# Altium PCB CC1200_PCB.PcbDoc (part 1 of 2)
Units mm, origin at the board's own origin, x right, y up, seen from the top; angles counter-clockwise.
Board outline 98.5 x 50 mm, 4 copper layers (Top Layer, GND, PWR, Bottom Layer), stack 1.57 mm thick; 129 components, 82 nets, 475 pads, 283 vias.
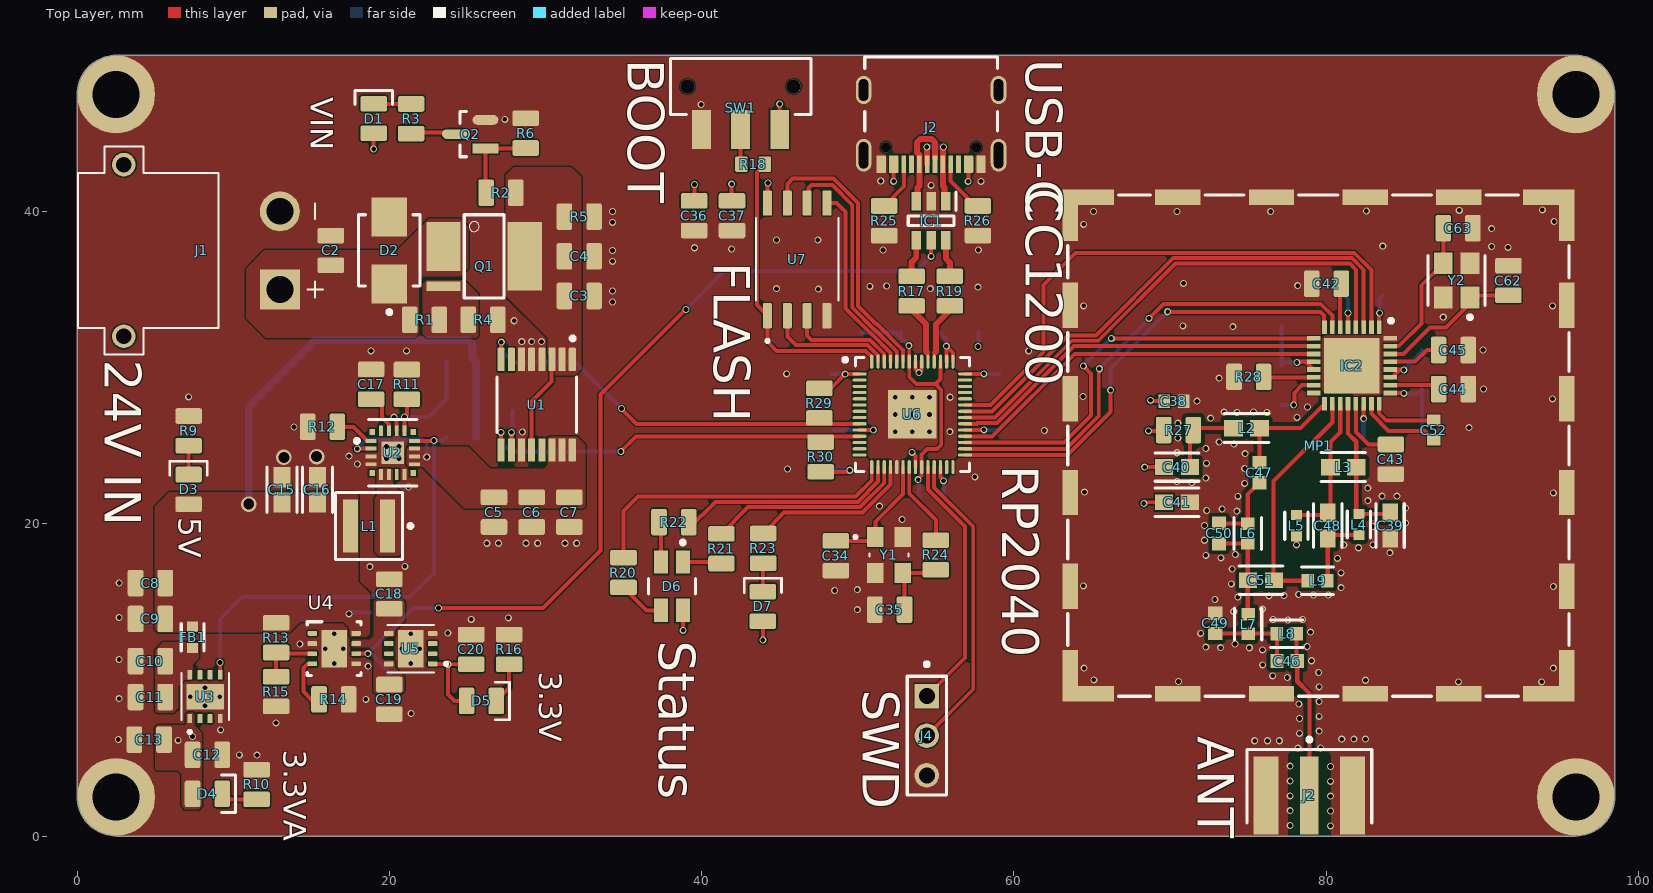
[diagram p0: Top Layer view]
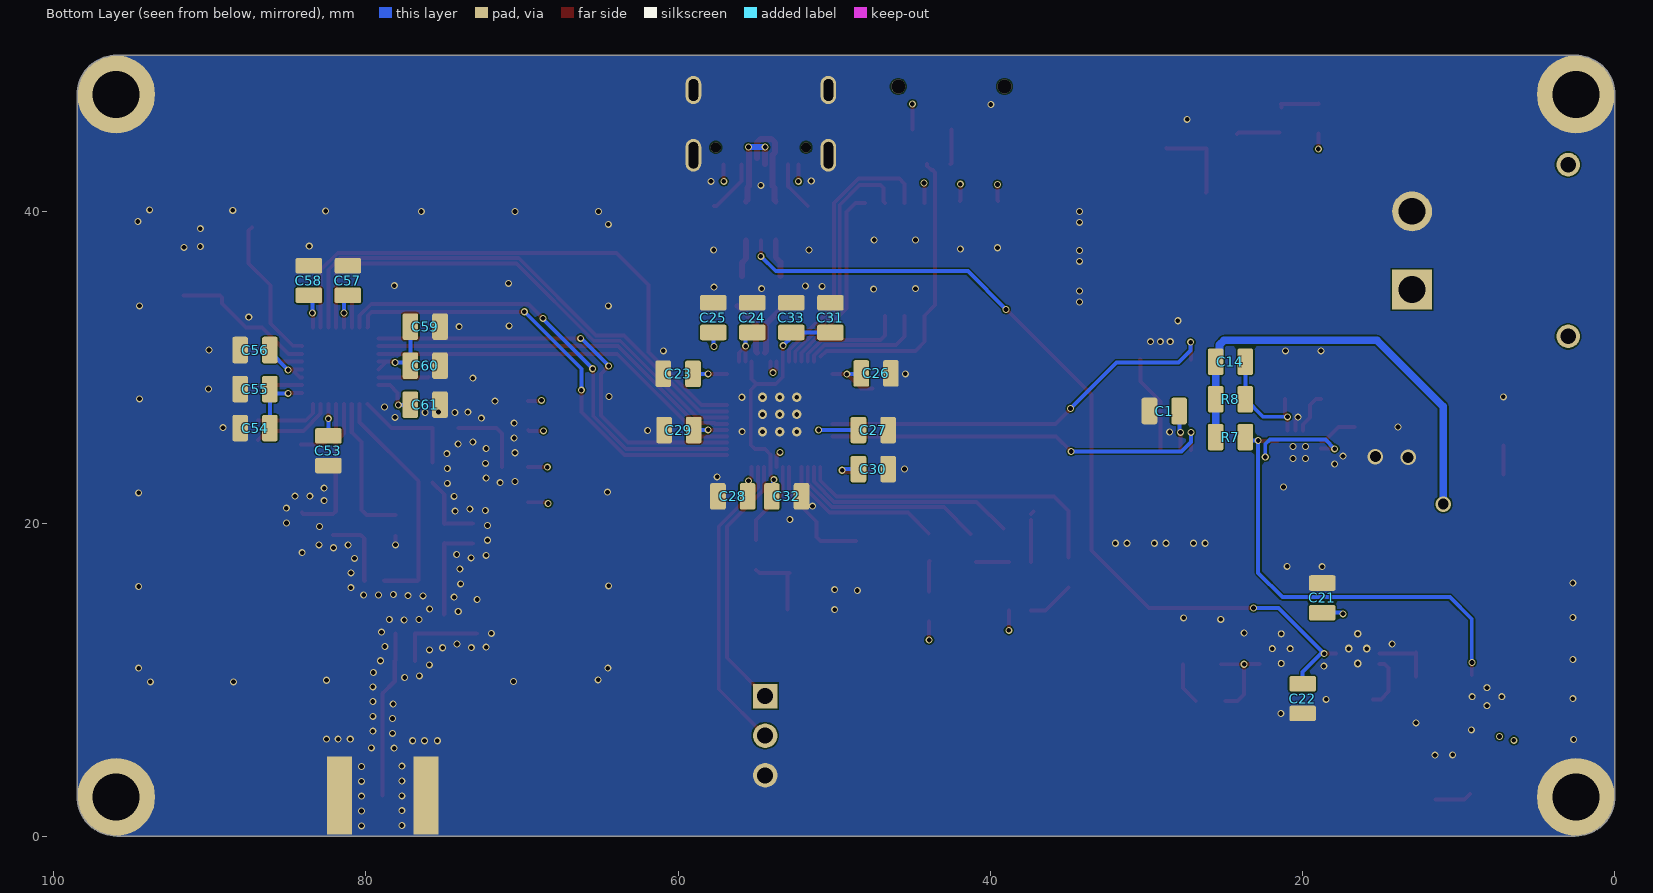
[diagram p1: Bottom Layer view, seen from below]
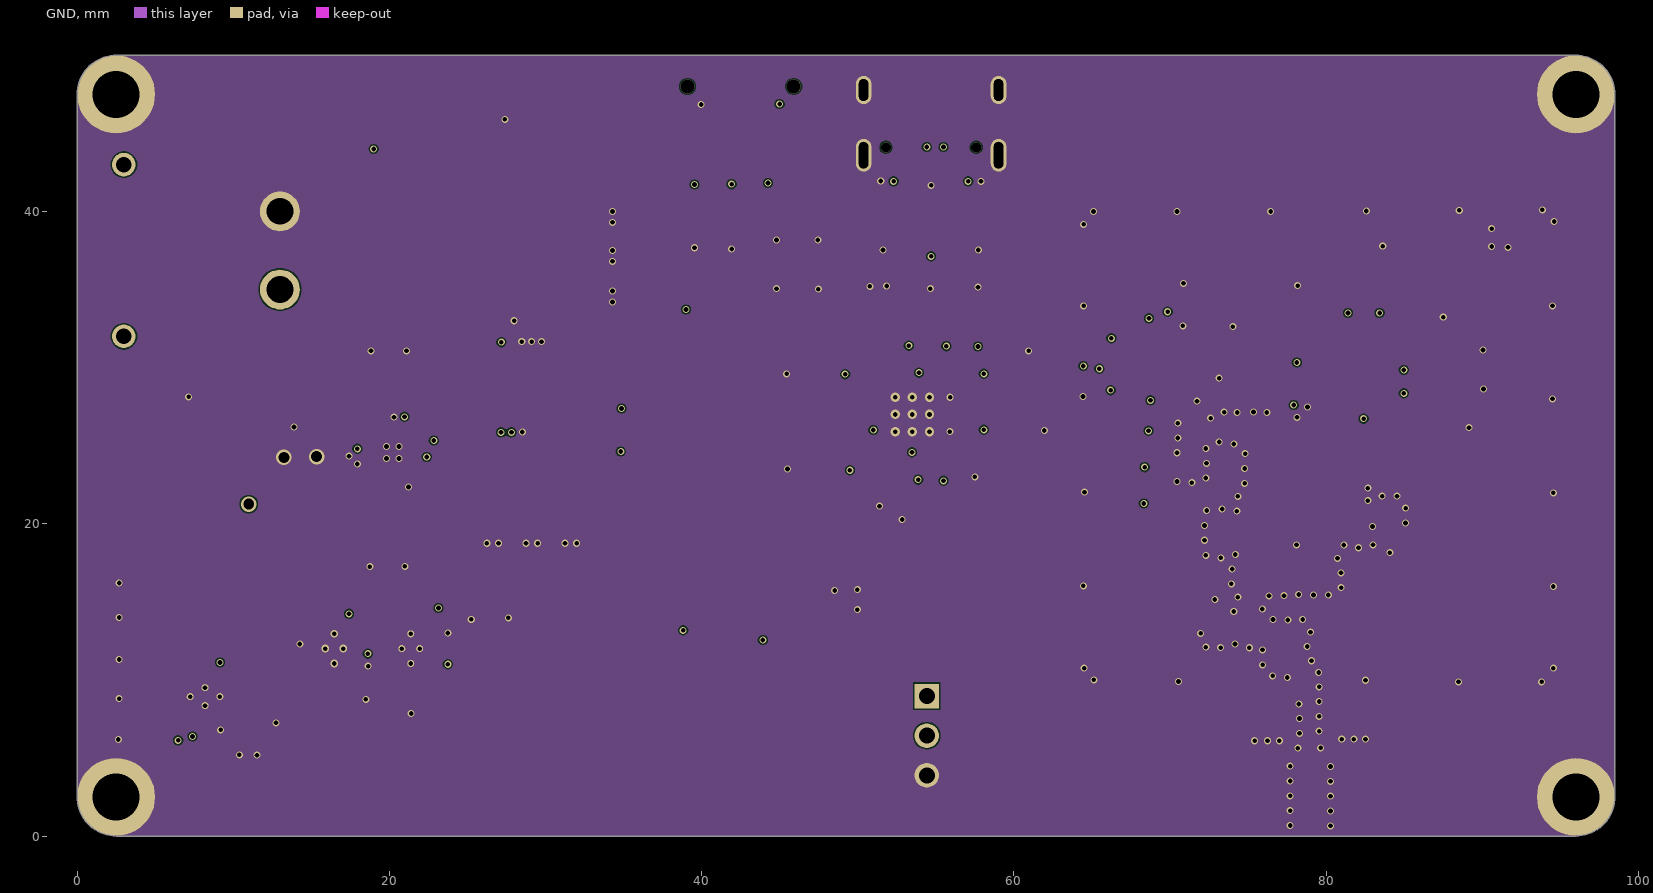
[diagram p2: GND]
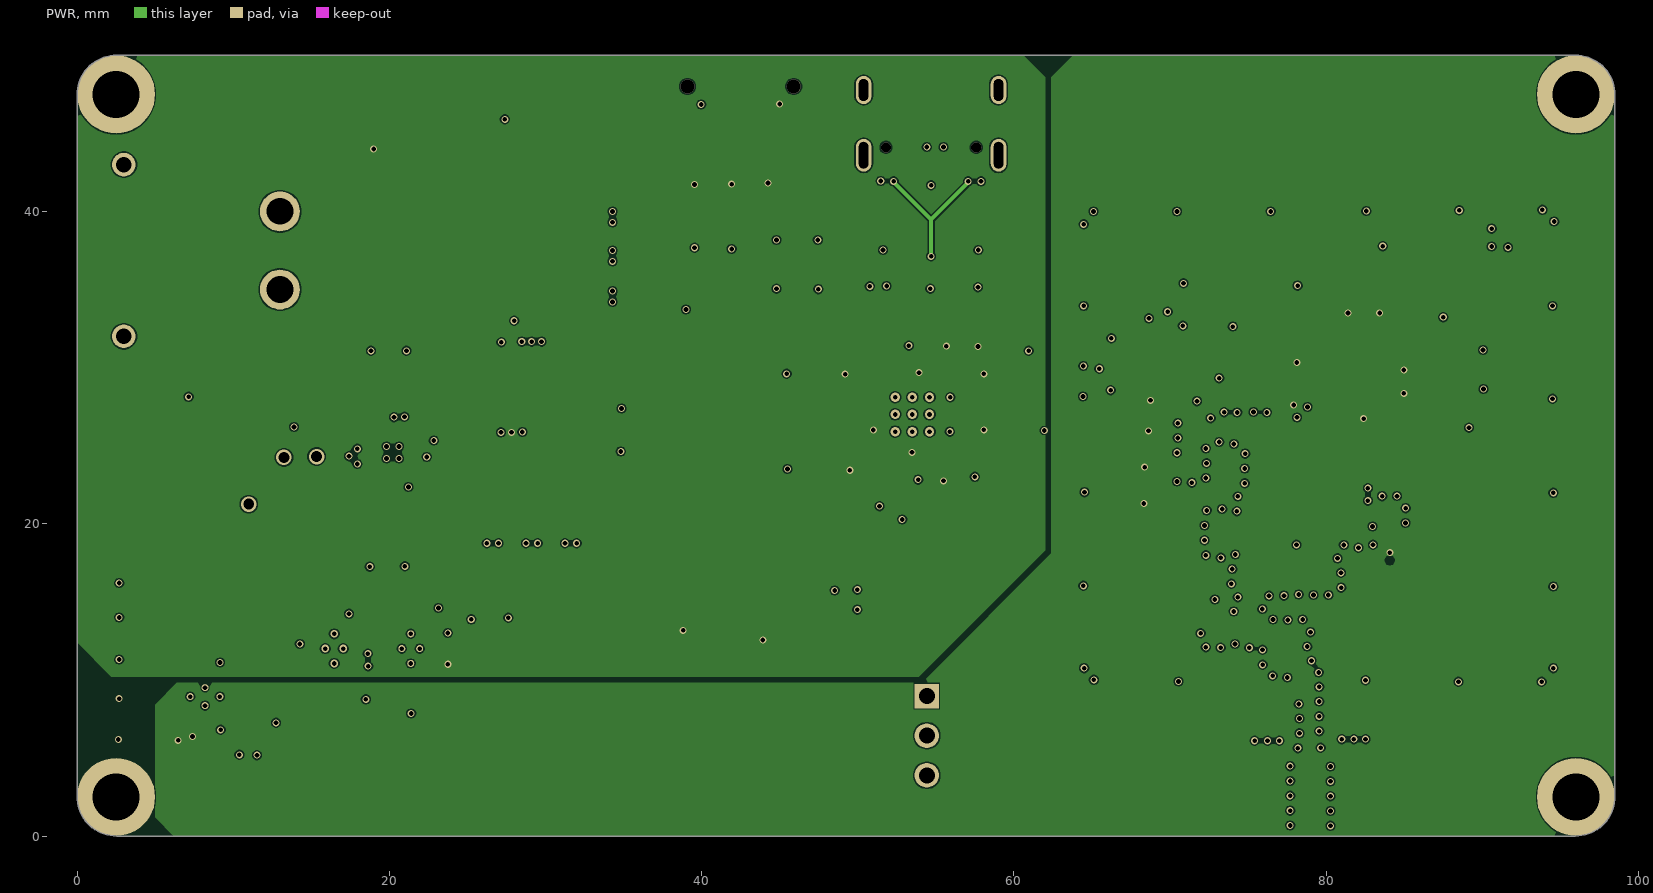
[diagram p3: PWR]
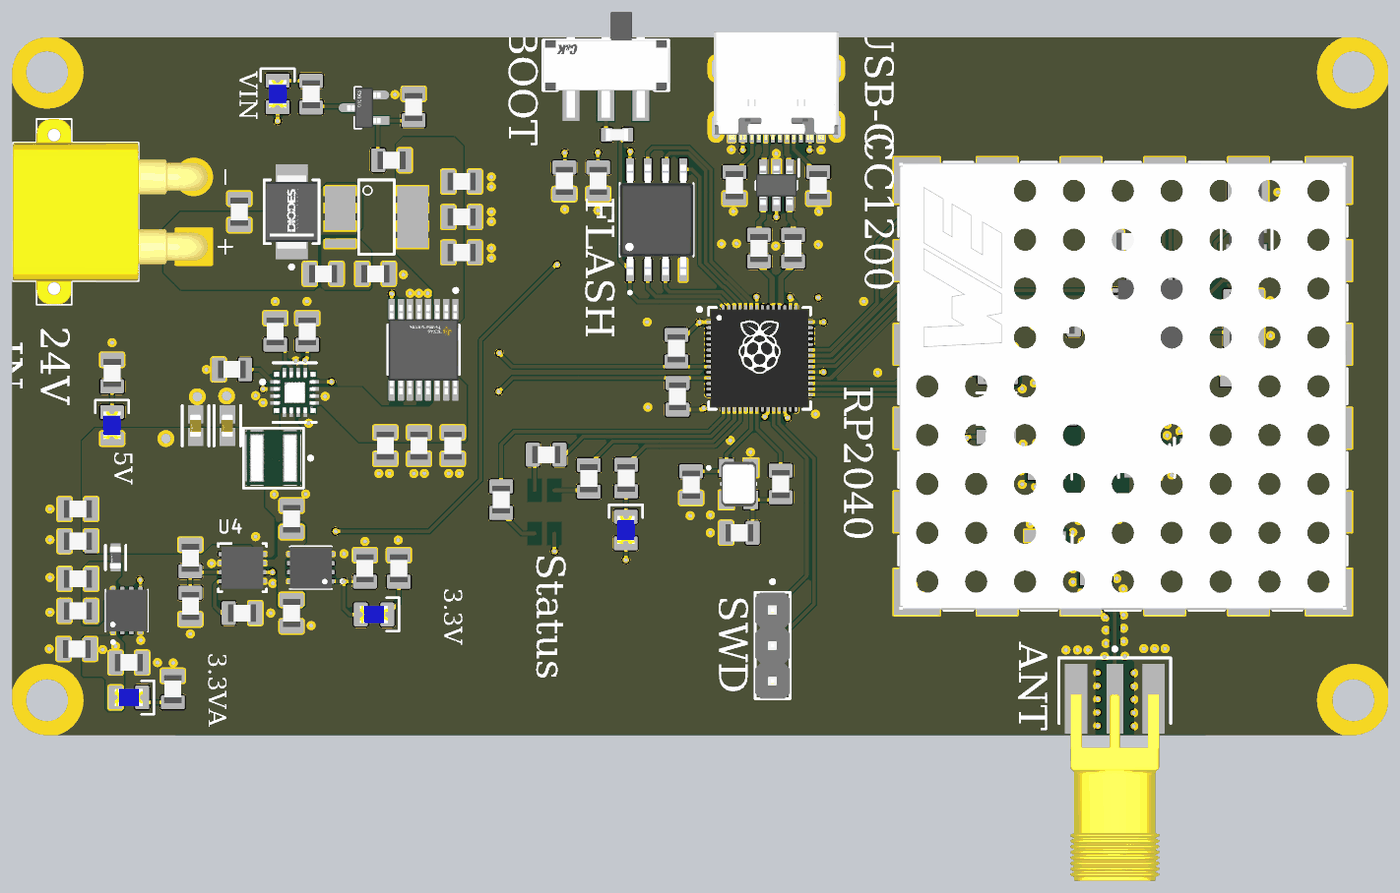
[diagram p5: 3D render of the assembled board from above, using the file's embedded part models]
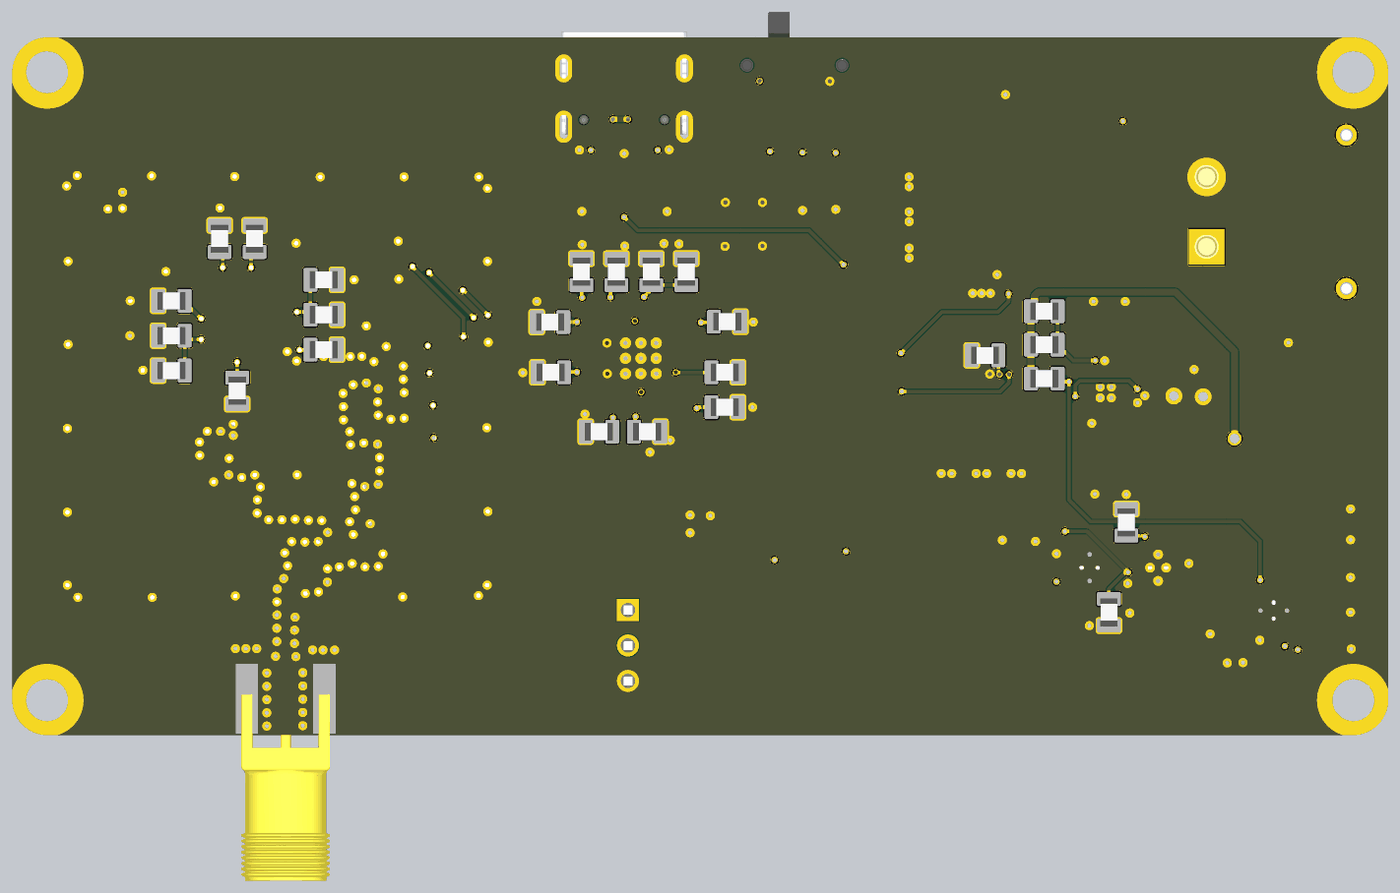
[diagram p6: 3D render of the assembled board from below, using the file's embedded part models]

## Layer stack, top to bottom
Top Solder: solder mask 0.0254, SM-001, Dk 4
Top Layer: signal copper 0.035
Dielectric 1: prepreg 0.2, PP-006, Dk 4.6
GND: signal copper 0.0175
Dielectric 2: core 1.065, Core-039, Dk 4.8
PWR: signal copper 0.0175
Dielectric 3: prepreg 0.2, PP-006, Dk 4.6
Bottom Layer: signal copper 0.035
Bottom Solder: solder mask 0.0254, SM-001, Dk 4

## Board outline
0,47.46 cw(c2.54,47.46) 2.54,50 95.96,50 cw(c95.96,47.46) 98.5,47.46 98.5,2.54 cw(c95.96,2.54) 95.96,0 2.54,0 cw(c2.54,2.54) 0,2.54 0,36

## Design rules (kind name [scope] priority, off if disabled: settings)
Clearance [All] p1: gap=0.089 ignorepadtopadclearanceinfootprint=FALSE
DiffPairsRouting [All] p1: maxlimit=0.254 minlimit=0.254 mostfreqgap=0.254 toplayer_minwidth=0.381 toplayer_maxwidth=0.381 toplayer_prefwidth=0.381 midlayer1_minwidth=0.381 midlayer1_maxwidth=0.381 midlayer1_prefwidth=0.381 midlayer2_minwidth=0.381 midlayer2_maxwidth=0.381 midlayer2_prefwidth=0.381 bottomlayer_minwidth=0.381 bottomlayer_maxwidth=0.381 bottomlayer_prefwidth=0.381 maxuncoupledlength=12.7
HoleSize [All] p1: absolutevalues=TRUE maxlimit=5 minlimit=0.3 maxpercent=80.000 minpercent=20.000
HoleToHoleClearance [All] p1: gap=0.02 allowstackedmicrovias=TRUE
MinimumSolderMaskSliver [All] p1: minsoldermaskwidth=0.02
PolygonConnect [All] p1: connectstyle=Direct reliefconductorwidth=0.254 reliefentries=4 polygonreliefangle="90 Angle" airgapwidth=0.254
RoutingVias [All] p1: holewidth=0.711 width=1.27 viastyle="Through Hole" minholewidth=0.3 minwidth=0.45 maxholewidth=3 maxwidth=5
SilkToSilkClearance [All] p1: silktosilkclearance=0.02
SilkToSolderMaskClearance [IsPad] p1: minsilkscreentomaskgap=0.02 clearancetoexposedcopper=TRUE
SolderMaskExpansion [All] p1: expansion=0.102 istentingtop=FALSE
SupplyNets "Schematic Supply Nets_2" [InNet('+3.3VA')] p1: voltage=0.000
SupplyNets "Schematic Supply Nets_11" [InNet('+5')] p2: voltage=0.000
SupplyNets "Schematic Supply Nets_10" [InNet('+24V')] p3: voltage=0.000
SupplyNets "Schematic Supply Nets_8" [InNet('XT30IN')] p4: voltage=0.000
SupplyNets "Schematic Supply Nets_4" [InNet('VCC')] p5: voltage=0.000
SupplyNets "Schematic Supply Nets_7" [InNet('Vbus')] p6: voltage=0.000
SupplyNets "Schematic Supply Nets_5" [InNet('GND')] p7: voltage=0.000
SupplyNets "Schematic Supply Nets_1" [InNet('+3.3V')] p8: voltage=0.000
SupplyNets "Schematic Supply Nets" [InNet('+1.1V')] p9: voltage=0.000
Width [InNetClass('50ohm')] p1: maxlimit=0.267 minlimit=0.254 preferedwidth=0.267 toplayer_minwidth=0.267 bottomlayer_minwidth=0.267 impedanceprofiledriven=TRUE impedanceprofileid={7642EF05-AF99-40F4-B98D-C09A1E5BA5A9} impedanceprofilevalue=50.000000 minimp=50.000000 maximp=50.000000 favimp=50.000000
Width Width_1 [All] p2: maxlimit=0.5 minlimit=0.254 preferedwidth=0.254 minimp=50.000000 maximp=50.000000 favimp=50.000000
24 further rules are at their usual default settings.

## Classes and differential pairs
net class 50ohm: LNA_N LNA_P NetC40_1 NetC46_1 NetC46_2 NetC47_1 NetC48_2 NetC50_1 PA TRX_SW
component class RF: C38 C39 C40 C41 C42 C43 C44 C45 C46 C47 C48 C49 C50 C51 C52 C53 C54 C55 C56 C57 C58 C59 C60 C61 C62 C63 IC2 J2 L2 L3 L4 L5 L6 L7 L8 L9 MP1 R27 R28 Y2
component class Peripherals: C36 C37 IC1 J2 R25 R26 U7
component class MCU: C23 C24 C25 C26 C27 C28 C29 C30 C31 C32 C33 C34 C35 D6 D7 J4 R17 R18 R19 R20 R21 R22 R23 R24 R29 R30 SW1 U6 Y1
component class PWR: C1 C2 C3 C4 C5 C6 C7 C8 C9 C10 C11 C12 C13 C14 C15 C16 C17 C18 C19 C20 C21 C22 D1 D2 D3 D4 D5 FB1 J1 L1 Q1 Q2 R1 R2 R3 R4 R5 R6 R7 R8 R9 R10 R11 R12 R13 R14 R15 R16 U U1 U2 U3 U4 U5
differential pair USB: +USB_P -USB_N
differential pair USBD: +USBD_P -USBD_N
differential pair USB_CON: +USB_CON_P -USB_CON_N

## Components (designator, comment, footprint, x,y, rotation, side; value= is the part's Value field where it differs from the comment)
C1 "Capacitor" RES_0805 28.864,27.219 r0 bottom value=0.1u
C2 "Capacitor" RES_0805 16.259,37.5 r90 top value=100n
C3 "Capacitor" RES_0805 32.166,34.585 r0 top value=22u
C4 "Capacitor" RES_0805 32.166,37.125 r0 top value=100n
C5 "Capacitor" RES_0805 26.705,20.742 r270 top value=47u
C6 "Capacitor" RES_0805 29.118,20.742 r270 top value=4.7u
C7 "Capacitor" RES_0805 31.531,20.742 r270 top value=0.1u
C8 "Capacitor" RES_0805 4.7,16.2 r180 top value=0.1u
C9 "Capacitor" RES_0805 4.7,13.9 r180 top value=1u
C10 "Capacitor" RES_0805 4.7,11.2 r180 top value=0.1u
C11 "Capacitor" RES_0805 4.7,8.9 r180 top value=4.7u
C12 "Capacitor" RES_0805 8.35,5.2 r0 top value=0.1u
C13 "Capacitor" RES_0805 4.625,6.175 r180 top value=4.7u
C14 "Capacitor" RES_0805 24.625,30.375 r0 bottom value=10p
C15 "GRM188D70J226ME01D" FP-GRM188-0_2-IPC_A 13.125,22.175 r270 top
C16 "GRM188D70J226ME01D" FP-GRM188-0_2-IPC_A 15.4,22.175 r270 top
C17 "Capacitor" RES_0805 18.831,28.931 r90 top value=10n
C18 "Capacitor" RES_0805 20,15.5 r90 top value=0.1u
C19 "Capacitor" RES_0805 20,8.75 r270 top value=10u
C20 "Capacitor" RES_0805 25.25,11.95 r90 top value=1u
C21 "Capacitor" RES_0805 18.75,15.25 r90 bottom value=0.1u
C22 "Capacitor" RES_0805 20,8.8 r270 bottom value=0.1u
C23 "Capacitor" RES_0805 60,29.6 r0 bottom value=100n
C24 "Capacitor" RES_0805 55.25,33.2 r90 bottom value=100n
C25 "Capacitor" RES_0805 57.75,33.2 r90 bottom value=100n
C26 "Capacitor" RES_0805 47.325,29.625 r180 bottom value=100n
C27 "Capacitor" RES_0805 47.5,26 r180 bottom value=100n
C28 "Capacitor" RES_0805 56.5,21.75 r0 bottom value=100n
C29 "Capacitor" RES_0805 59.95,26 r0 bottom value=100n
C30 "Capacitor" RES_0805 47.5,23.5 r180 bottom value=1u
C31 "Capacitor" RES_0805 50.25,33.2 r90 bottom value=100n
C32 "Capacitor" RES_0805 53.05,21.75 r180 bottom value=100n
C33 "Capacitor" RES_0805 52.75,33.2 r90 bottom value=1u
C34 "Capacitor" RES_0805 48.6,17.95 r270 top value=15p
C35 "Capacitor" RES_0805 52.05,14.5 r180 top value=15p
C36 "Capacitor" RES_0805 39.525,39.725 r270 top value=100n
C37 "Capacitor" RES_0805 41.95,39.725 r270 top value=100n
C38 "GCJ188R71C103KA01D" CAPC1608X90X35LL10T15 70.25,27.85 r180 top
C39 "06035A5R1CAT2A" FP-GCM188-0_1-IPC_A 84.1,19.875 r270 top
C40 "06035A560JAT2A" FP-GCM188-0_1-IPC_A 70.448,23.625 r180 top
C41 "06035A101JAT2A" FP-GCM188-0_1-IPC_A 70.45,21.375 r180 top
C42 "Capacitor" RES_0805 80.025,35.375 r180 top value=220n
C43 "Capacitor" RES_0805 84.15,24.125 r270 top value=10n
C44 "Capacitor" RES_0805 88.15,28.625 r0 top value=47n
C45 "Capacitor" RES_0805 88.15,31.125 r0 top value=47n
C46 "DNP" CAPC1608X90X35LL15T15 77.5,11.2 r180 top
C47 "06035A390JAT2A" CAPC1608X90X35LL15T15 75.725,23.275 r90 top
C48 "06035A5R1CAT2A" FP-GCM188-0_1-IPC_A 80.1,19.875 r270 top
C49 "06035A6R2CAT2A" CAPC1608X90X35LL15T15 72.9,13.625 r270 top
C50 "06035A2R2CAT2A" CAPC1608X90X35LL15T15 73.15,19.375 r90 top
C51 "06035A5R1CAT2A" FP-GCM188-0_1-IPC_A 75.823,16.375 r180 top
C52 "GCM188R71H152KA37D" CAPC1608X90X35LL10T15 86.9,26 r90 top
C53 "Capacitor" RES_0805 82.4,24.675 r270 bottom value=47n
C54 "Capacitor" RES_0805 87.1,26.125 r0 bottom value=47n
C55 "Capacitor" RES_0805 87.1,28.625 r0 bottom value=47n
C56 "Capacitor" RES_0805 87.1,31.125 r0 bottom value=47n
C57 "Capacitor" RES_0805 81.15,35.575 r90 bottom value=47n
C58 "Capacitor" RES_0805 83.65,35.575 r90 bottom value=47n
C59 "Capacitor" RES_0805 76.2,32.625 r180 bottom value=47n
C60 "Capacitor" RES_0805 76.2,30.125 r180 bottom value=47n
C61 "Capacitor" RES_0805 76.2,27.625 r180 bottom value=47n
C62 "Capacitor" RES_0805 91.675,35.575 r90 top value=15p
C63 "Capacitor" RES_0805 88.45,38.925 r0 top value=15p
D1 "BLUE" LED_0805_BLUE 19,45.95 r270 top
D2 "SMBJ33A-13-F" FP-SMB-MFG 20,37.5 r90 top
D3 "BLUE" LED_0805_BLUE 7.147,22.2 r270 top
D4 "BLUE" LED_0805_BLUE 8.35,2.7 r180 top
D5 "BLUE" LED_0805_BLUE 25.9,8.65 r180 top
D6 "150141M173100" WL-SFTW_3528_150141M173100 1308.1,-1254 r270 top
D7 "BLUE" LED_0805_BLUE 43.925,14.7 r270 top
FB1 "BLM18HE601SN1D" FP-BLM18-0_15-t0_8-MFG 7.4,12.725 r270 top
IC1 "USBLC6-2SC6" SOT95P280X145-6N 54.7,39.4 r270 top
IC2 "CC1200RHBR" QFN50P500X500X100-33N-D 81.65,30.125 r270 top
J1 "XT30PW-M" AMASS_XT30PW-M 3,37.5 r90 top
J2 "CON-SMA-EDGE-S" FP-CON-SMA-EDGE-S-MFG 78.925,-4.66 r180 top
J2 "USB4105-GF-A-060" USB4105-GF-A-060 54.7,45.4 r180 top
J4 "PR20203VBNN" FP-PR20203VBNN-MFG 54.425,6.425 r270 top
L1 "XFL4020-222MEC" FP-XFL4020-MFG 18.704,19.853 r180 top
L2 "LQG18HN56NJ00D" FP-LQG18HH_00-IPC_A 74.9,26.125 r180 top
L3 "LQG18HN56NJ00D" FP-LQG18HH_00-IPC_A 81.1,23.625 r0 top
L4 "LQG18HN27NJ00D" FP-LQG18HH_00-MFG 82.1,19.95 r90 top
L5 "LQG18HN27NJ00D" FP-LQG18HH_00-MFG 78.1,19.875 r90 top
L6 "LQG18HN15NJ00D" FP-LQG18HH_00-IPC_C 74.975,19.375 r270 top
L7 "LQG18HN43NJ00" FP-LQG18HH_00-IPC_C 75,13.575 r270 top
L8 "LQG18HN22NJ00D" FP-LQG18HH_00-IPC_C 77.476,12.95 r0 top
L9 "LQG18HN15NJ00D" FP-LQG18HH_00-IPC_C 79.45,16.35 r180 top
MP1 "36906326S" 36906326S 79.5,25 r90 top
Q1 "SI7465DP" SO08-E3 26.07,37.125 r270 top
Q2 "MMBT3904-7-F" FP-SOT23-IPC_A 25.181,44.95 r180 top
R1 "Resistor" RES_0805 22.26,33.061 r0 top value=100k
R2 "Resistor" RES_0805 27.15,41.2 r180 top value=100k
R3 "Resistor" RES_0805 21.395,45.932 r270 top value=1k
R4 "Resistor" RES_0805 26.004,33.061 r0 top value=100k
R5 "Resistor" RES_0805 32.166,39.665 r0 top value=220k
R6 "Resistor" RES_0805 28.737,45.011 r90 top value=1M
R7 "Resistor" RES_0805 24.625,25.55 r180 bottom value=100k
R8 "Resistor" RES_0805 24.625,27.975 r0 bottom value=1M
R9 "Resistor" RES_0805 7.147,25.949 r90 top value=2k
R10 "Resistor" RES_0805 11.5,3.3 r90 top value=1.5k
R11 "Resistor" RES_0805 21.125,28.925 r90 top value=182k
R12 "Resistor" RES_0805 15.722,26.203 r180 top value=100k
R13 "Resistor" RES_0805 12.75,12.7 r270 top value=150k
R14 "Resistor" RES_0805 16.45,8.75 r0 top value=110k
R15 "Resistor" RES_0805 12.75,9.25 r270 top value=100k
R16 "Resistor" RES_0805 27.675,11.95 r90 top value=1.5k
R17 "Resistor" RES_0805 53.45,34.9 r90 top value=27.4
R18 "Resistor" RES_0603 43.3,43.025 r180 top value=10k
R19 "Resistor" RES_0805 55.9,34.9 r90 top value=27.4
R20 "Resistor" RES_0805 35,16.875 r90 top value=1k5
R21 "Resistor" RES_0805 41.275,18.4 r90 top value=1k5
R22 "Resistor" RES_0805 38.225,20.1 r0 top value=1k5
R23 "Resistor" RES_0805 43.95,18.425 r90 top value=1.5k
R24 "Resistor" RES_0805 55,18 r90 top value=1k
R25 "Resistor" RES_0805 51.7,39.4 r270 top value=5.1k
R26 "Resistor" RES_0805 57.7,39.4 r270 top value=5.1k
R27 "Resistor" RES_0805 70.55,26 r0 top value=18
R28 "Resistor" RES_0805 75.05,29.4 r180 top value=56k
R29 "Resistor" RES_0805 47.55,27.725 r90 top value=4.7k
R30 "Resistor" RES_0805 47.625,24.275 r270 top value=4.7k
SW1 "JS102011SAQN" FP-JS102011SAQN-MFG 42.5,48 r180 top
U1 "INA260AIPWR" FP-PW0016A-MFG 29.443,27.621 r270 top
U2 "LT8609SIV#PBF" FP-LQFN-16-05-08-1516-MFG 20.225,24.556 r0 top
U3 "TPS7A2133PQWDRBRQ1" VREG_TPS7A2133PQWDRBRQ1 8.2,8.925 r90 top
U4 "TPS2113ADRBT" DRB0008B_V 16.475,12 r0 top
U5 "TPS7A2133PQWDRBRQ1" VREG_TPS7A2133PQWDRBRQ1 21.375,12 r180 top
U6 "RP2040" QFN-56-EP 53.5,27 r0 top
U7 "W25Q128JVSIQ" SOIC127P790X216-8N 46.125,36.925 r90 top
Y1 "ABM8-272-T3" XTAL_ABM8-272-T3 52,18 r0 top
Y2 "NX3225SA-40.000MHZ-STD-CSR-1 NDK" FP-ABM8G-MFG 88.357,35.579 r90 top

## Footprints (in the part's own frame and the unit in brackets; to place one, negate y for a bottom-side part, rotate by r counter-clockwise, add the part's x,y. Pads: shape width x height; smd on the part's side, far side on the other; paste and mask are expansions set on the pad)
36906326S [mm] "Shielding Cabinet, body 32x32mm"
  rect 1x2.9 smd: 1(-15.9,-9) 1(-15.9,-3) 1(-15.9,3) 1(-15.9,9) 1(15.9,-9) 1(15.9,-3) 1(15.9,3) 1(15.9,9)
  rect 1x3.3 smd: 1(-15.9,-14.75) 1(-15.9,14.75) 1(15.9,-14.75) 1(15.9,14.75)
  rect 3.3x1 smd: 1(-14.75,-15.9) 1(-14.75,15.9) 1(14.75,-15.9) 1(14.75,15.9)
  rect 2.9x1 smd: 1(-9,-15.9) 1(-9,15.9) 1(-3,-15.9) 1(-3,15.9) 1(3,-15.9) 1(3,15.9) 1(9,-15.9) 1(9,15.9)
  silkscreen extent -16.05,-16.05 16.05,16.05, body extent -16,-16 16,16, height 6
AMASS_XT30PW-M [mm]
  round 2.55 hole 1.7: N(2.5,-10)
  rect 2.55x2.55 / inner round 2.55 / far side rect 2.55x2.55 hole 1.7: P(-2.5,-10)
  round 1.508 hole 1: S1(5.5,0) S2(-5.5,0)
  silkscreen extent -6.65,-12.75 6.65,2.95, body extent -6.65,-11 6.65,2.95, height 5
CAPC1608X90X35LL10T15 [mm] "Chip Capacitor, 2-Leads, Body 1.7x0.9mm, IPC High Density"
  rect 0.75x0.85 smd: 1(-0.625,0) 2(0.625,0)
  body extent -0.85,-0.45 0.85,0.45, height 0.9
CAPC1608X90X35LL15T15 [mm] "Chip Capacitor, 2-Leads, Body 1.60x0.81mm, IPC High Density"
  rect 0.85x0.9 smd: 1(-0.65,0) 2(0.65,0)
  body extent -0.88,-0.48 0.87,0.48, height 0.9
DRB0008B_V [mm] "SON, 8-Leads, Body 3x3mm, Pitch 0.65mm, Thermal Pad 2.4x1.65mm, TI Recommended"
  rrect33% 0.6x0.3 smd: 1(-1.4,0.975) 2(-1.4,0.325) 3(-1.4,-0.325) 4(-1.4,-0.975) 5(1.4,-0.975) 6(1.4,-0.325) 7(1.4,0.325) 8(1.4,0.975)
  rrect6% 1.65x2.4 smd paste-1.2: 9(0,0)
  silkscreen extent -1.73,-1.73 1.73,1.73, body extent -1.5,-1.5 1.5,1.5, height 0.96
FP-ABM8G-MFG [mm]
  rect 1.4x1.2 smd paste+0 mask+0: 1(-1.1,-0.85) 2(1.1,-0.85) 3(1.1,0.85) 4(-1.1,0.85)
  silkscreen extent -2.47,-1.83 1.6,1.83, body extent -1.9,-1.55 1.9,1.55, height 0.25
FP-BLM18-0_15-t0_8-MFG [mm]
  rect 0.65x0.7 smd paste+0 mask+0: 1(-0.675,0) 2(0.675,0)
  silkscreen extent -0.87,-0.72 0.87,0.72, body extent -1.1,-0.58 1.1,0.58, height 0.25
FP-CON-SMA-EDGE-S-MFG [mm]
  rect 1.2x5 smd paste+0 mask+0: 1(0,-7.26)
  rect 1.6x5 smd paste+0 mask+0: 2(-2.77,-7.26) 3(2.77,-7.26)
  rect 1.6x5 smd far side paste+0 mask+0: 4(-2.77,-7.26) 5(2.77,-7.26)
  silkscreen extent -4,-10.96 4,-5.5, body extent -3.67,-9.86 3.67,4.86, height 0.25
FP-GCM188-0_1-IPC_A [mm]
  rect 1.159x1.012 smd paste+0 mask+0: 1(-0.827,0) 2(0.827,0)
  silkscreen extent -1.41,-0.91 1.41,0.91, body extent -1.91,-1.01 1.91,1.01, height 0.25
FP-GRM188-0_2-IPC_A [mm]
  rect 1.305x1.106 smd paste+0 mask+0: 1(-0.801,0) 2(0.801,0)
  silkscreen extent -1.45,-0.95 1.45,0.95, body extent -1.95,-1.05 1.95,1.05, height 0.25
FP-JS102011SAQN-MFG [mm]
  rect 1.2x2.5 smd paste+0 mask+0: 1(-2.5,2.75) 2(0,2.75) 3(2.5,2.75)
  round 0.9 hole 0.9 unplated paste-2539.97 mask+0: ""(-3.4,0) ""(3.4,0)
  silkscreen extent -4.5,-1.8 4.5,1.8, body extent -4.6,-3.9 4.6,4.1, height 0.25
FP-LQFN-16-05-08-1516-MFG [mm]
  rect 0.7x0.25 smd paste+0 mask+0: 1(-1.4,0.75) 2(-1.4,0.25) 3(-1.4,-0.25) 4(-1.4,-0.75) 9(1.4,-0.75) 10(1.4,-0.25) 11(1.4,0.25) 12(1.4,0.75)
  rect 0.25x0.7 smd paste+0 mask+0: 5(-0.75,-1.4) 6(-0.25,-1.4) 7(0.25,-1.4) 8(0.75,-1.4) 13(0.75,1.4) 14(0.25,1.4) 15(-0.25,1.4) 16(-0.75,1.4)
  rect 1.45x1.45 smd paste+0 mask+0: 17(0,0)
  rect 0.375x0.375 smd paste+0 mask+0: 18(-1.312,1.312) 19(1.312,1.312) 20(-1.312,-1.312) 21(1.312,-1.312)
  silkscreen extent -2.42,-2.14 1.55,2.12, body extent -1.85,-1.85 1.85,1.85, height 0.25
FP-LQG18HH_00-IPC_A [mm]
  rect 1.206x1.058 smd paste+0 mask+0: 1(-0.826,0) 2(0.826,0)
  silkscreen extent -1.43,-0.93 1.43,0.93, body extent -1.93,-1.03 1.93,1.03, height 0.25
FP-LQG18HH_00-IPC_C [mm]
  rect 0.806x0.858 smd paste+0 mask+0: 1(-0.626,0) 2(0.626,0)
  silkscreen extent -1.03,-0.87 1.03,0.87, body extent -1.13,-0.58 1.13,0.58, height 0.25
FP-LQG18HH_00-MFG [mm]
  rect 0.65x0.7 smd paste+0 mask+0: 1(-0.675,0) 2(0.675,0)
  silkscreen extent -0.87,-0.75 0.87,0.75, body extent -1.1,-0.58 1.1,0.58, height 0.25
FP-PR20203VBNN-MFG [mm]
  rect 1.57x1.57 hole 1.02 paste-2539.97 mask+0: 1(-2.54,0)
  round 1.57 hole 1.02 paste-2539.97 mask+0: 2(0,0) 3(2.54,0)
  silkscreen extent -4.7,-1.25 3.81,1.25, body extent -3.91,-1.35 3.91,1.35, height 0.25
FP-PW0016A-MFG [mm]
  rrect22% 1.5x0.45 smd paste+0 mask+0: 1(-2.9,2.275) 2(-2.9,1.625) 3(-2.9,0.975) 4(-2.9,0.325) 5(-2.9,-0.325) 6(-2.9,-0.975) 7(-2.9,-1.625) 8(-2.9,-2.275) 9(2.9,-2.275) 10(2.9,-1.625) 11(2.9,-0.975) 12(2.9,-0.325) 13(2.9,0.325) 14(2.9,0.975) 15(2.9,1.625) 16(2.9,2.275)
  silkscreen extent -4.37,-2.55 1.78,2.55, body extent -3.75,-2.8 3.75,2.8, height 0.25
FP-SMB-MFG [mm]
  rect 2.5x2.3 smd paste+0 mask+0: 1(-2.15,0) 2(2.15,0)
  silkscreen extent -4.07,-1.97 2.28,1.97, body extent -3.5,-2.07 3.5,2.07, height 0.25
FP-SOT23-IPC_A [mm]
  rect 1.659x0.627 smd paste+0 mask+0: 1(-0.977,0.915)
  rrect100% 1.659x0.627 smd paste+0 mask+0: 2(-0.977,-0.915) 3(0.977,0)
  silkscreen extent 0.23,-1.45 0.65,1.45, body extent -2.31,-1.95 2.31,1.95, height 0.25
FP-XFL4020-MFG [mm]
  rect 0.98x3.4 smd paste+0 mask+0: 1(-1.185,0) 2(1.185,0)
  silkscreen extent -2.78,-2.15 2.15,2.15, body extent -2.25,-2.25 2.25,2.25, height 0.25
LED_0805_BLUE [mm]
  rrect25% 1x1.7 smd: A(0.95,0) K(-0.95,0)
  silkscreen extent -1.8,-1.2 -0.9,1.2, body extent -1,-0.63 1,0.63, height 1.12
QFN50P500X500X100-33N-D [mm]
  rect 0.85x0.3 smd: 1(-2.45,1.75) 2(-2.45,1.25) 3(-2.45,0.75) 4(-2.45,0.25) 5(-2.45,-0.25) 6(-2.45,-0.75) 7(-2.45,-1.25) 8(-2.45,-1.75) 17(2.45,-1.75) 18(2.45,-1.25) 19(2.45,-0.75) 20(2.45,-0.25) 21(2.45,0.25) 22(2.45,0.75) 23(2.45,1.25) 24(2.45,1.75)
  rect 0.3x0.85 smd: 9(-1.75,-2.45) 10(-1.25,-2.45) 11(-0.75,-2.45) 12(-0.25,-2.45) 13(0.25,-2.45) 14(0.75,-2.45) 15(1.25,-2.45) 16(1.75,-2.45) 25(1.75,2.45) 26(1.25,2.45) 27(0.75,2.45) 28(0.25,2.45) 29(-0.25,2.45) 30(-0.75,2.45) 31(-1.25,2.45) 32(-1.75,2.45)
  rect 3.55x3.55 smd: 33(0,0)
  silkscreen extent -3,2.38 -2.75,2.63, body extent -2.5,-2.5 2.5,2.5, height 1
QFN-56-EP [mm]
  oval 0.9x0.2 smd mask+0.15: 1(-3.375,2.6) 2(-3.375,2.2) 3(-3.375,1.8) 4(-3.375,1.4) 5(-3.375,1) 6(-3.375,0.6) 7(-3.375,0.2) 8(-3.375,-0.2) 9(-3.375,-0.6) 10(-3.375,-1) 11(-3.375,-1.4) 12(-3.375,-1.8) 13(-3.375,-2.2) 14(-3.375,-2.6) 29(3.375,-2.6) 30(3.375,-2.2) 31(3.375,-1.8) 32(3.375,-1.4) 33(3.375,-1) 34(3.375,-0.6) 35(3.375,-0.2) 36(3.375,0.2) 37(3.375,0.6) 38(3.375,1) 39(3.375,1.4) 40(3.375,1.8) 41(3.375,2.2) 42(3.375,2.6)
  oval 0.2x0.9 smd mask+0.15: 15(-2.6,-3.375) 16(-2.2,-3.375) 17(-1.8,-3.375) 18(-1.4,-3.375) 19(-1,-3.375) 20(-0.6,-3.375) 21(-0.2,-3.375) 22(0.2,-3.375) 23(0.6,-3.375) 24(1,-3.375) 25(1.4,-3.375) 26(1.8,-3.375) 27(2.2,-3.375) 28(2.6,-3.375) 43(2.6,3.375) 44(2.2,3.375) 45(1.8,3.375) 46(1.4,3.375) 47(1,3.375) 48(0.6,3.375) 49(0.2,3.375) 50(-0.2,3.375) 51(-0.6,3.375) 52(-1,3.375) 53(-1.4,3.375) 54(-1.8,3.375) 55(-2.2,3.375) 56(-2.6,3.375)
  rect 3.1x3.1 smd: 57(0,0)
  silkscreen extent -4.42,-3.65 3.65,3.65, body extent -3.51,-3.51 3.51,3.51, height 1.01
RES_0603 [mm]
  rrect25% 0.8x1 smd: 1(-0.75,0) 2(0.75,0)
  body extent -0.8,-0.43 0.8,0.43, height 0.52
RES_0805 [mm]
  rrect25% 1x1.7 smd: 1(-0.95,0) 2(0.95,0)
  body extent -1,-0.63 1,0.63, height 0.47
SO08-E3 [mm]
  rect 3.15x2.2 smd mask+0: 1-3(-0.635,-2.6)
  rect 0.6x2.2 smd: 4(1.905,-2.6)
  rect 4.4x2.2 smd mask+0: 5-8(0,2.6)
  silkscreen extent -2.67,-1.27 2.67,1.27
SOIC127P790X216-8N [mm]
  rrect25% 1.61x0.58 smd: 1(-3.605,1.905) 2(-3.605,0.635) 3(-3.605,-0.635) 4(-3.605,-1.905) 5(3.605,-1.905) 6(3.605,-0.635) 7(3.605,0.635) 8(3.605,1.905)
  silkscreen extent -5.31,-2.64 2.64,2.64, body extent -3.95,-2.64 3.95,2.64, height 2.16
SOT95P280X145-6N [mm]
  rect 1.2x0.6 smd: 1(-1.25,0.95) 2(-1.25,0) 3(-1.25,-0.95) 4(1.25,-0.95) 5(1.25,0) 6(1.25,0.95)
  silkscreen extent -1.85,-1.46 0.3,1.6, body extent -1.4,-1.46 1.4,1.46, height 1.45
USB4105-GF-A-060 [mm]
  rrect25% 0.6x1.15 smd mask+0.05: A1B12(-3.2,2.378) A4B9(-2.4,2.378) B1A12(3.2,2.378) B4A9(2.4,2.378)
  rrect25% 0.3x1.15 smd mask+0.05: A5(-1.25,2.378) A6(-0.25,2.378) A7(0.25,2.378) A8(1.25,2.378) B5(1.75,2.378) B6(0.75,2.378) B7(-0.75,2.378) B8(-1.75,2.378)
  round 0.65 hole 0.65 unplated mask+0.05: MH(-2.89,1.303) MH(2.89,1.303)
  oval 1x1.8 hole 0.6 slot 1.4 at 90 deg: SH(-4.32,-2.377) SH(4.32,-2.377)
  oval 1x2.1 hole 0.6 slot 1.7 at 90 deg: SH(-4.32,1.803) SH(4.32,1.803)
  silkscreen extent -4.25,-4.5 4.25,0.25, body extent -4.47,-4.97 4.47,2.73, height 3.27
VREG_TPS7A2133PQWDRBRQ1 [mm]
  rrect32% 0.6x0.31 smd mask+0: 1(-1.4,0.975) 2(-1.4,0.325) 3(-1.4,-0.325) 4(-1.4,-0.975) 5(1.4,-0.975) 6(1.4,-0.325) 7(1.4,0.325) 8(1.4,0.975)
  rrect6% 1.65x2.4 smd paste-2 mask+0: 9(0,0)
  round 0.45 hole 0.3 mask+0: 10(0,0.95) 11(-0.575,0) 12(0.575,0) 13(0,-0.95)
  silkscreen extent -2.36,-1.52 1.5,1.52, body extent -1.5,-1.5 1.5,1.5, height 1
WL-SFTW_3528_150141M173100 [mm] "SMT Full-color TOP LED Waterclear, body 3.5x2.8mm"
  rect 1.5x0.9 smd: 1(-1268.45,-1269.3) 2(-1268.45,-1270.7) 3(-1271.55,-1269.3) 4(-1271.55,-1270.7)
  silkscreen extent -1272.92,-1271.5 -1269.5,-1268.5, body extent -1271.75,-1271.4 -1268.25,-1268.6, height 1.9
XTAL_ABM8-272-T3 [mm]
  rect 1.05x1.3 smd: 1(-0.875,1.15) 2(-0.875,-1.15) 3(0.875,-1.15) 4(0.875,1.15)
  silkscreen extent -2.24,-0.09 1.25,1.25, body extent -1.25,-1.6 1.25,1.6, height 0.7

## Part data
C15 C16: library part CMP-06035-063568-1, "Multilayer Ceramic Capacitor 22uF 20% 6.3V X7T 0603 Paper T/R"
C38: library part CMP-2000-06338-1, "Cap Ceramic 0.01uF 16V X7R 10% Pad SMD 0603 Soft Termination 125C Automotive T/R", Capacitance=10nF, Case Size/Dimension=0603, Dielectric=X7R, Manufacturer=Murata, Package Description="2-Pin Surface Mount Device, Body 1.6 x 0.8 mm", Rated Voltage=16V, Tolerance (%)=±10%, Datasheet URL=http://search.murata.co.jp/Ceramy/image/img/A01X/G101/ENG/GRM188R71C103KA01-01.pdf, Datasheet Version=02/2016, Manufacturer URL=http://www.murata.com/, Mounting Technology=SurfaceMount, Package Reference=0603
C39 C48 C51: library part CMP-06035-052280-1, "0603 5.1 pF 50 V ±0.25 pF Tolerance C0G/NP0 Multilayer Ceramic Capacitor"
C40: library part CMP-06035-052280-1, "0603 56 pF 50 V ±5% Tolerance C0G/NP0 Surface Mount Multilayer Ceramic Capacitor"
C41: library part CMP-06035-052280-1, "0603 100 pF 50 V ±5% Tolerance C0G/NP0 SMT Multilayer Ceramic Capacitor"
C46 C47: library part CMP-2006-04354-1, Manufacturer="AVX Interconnect / Elco", Part Number=06035A6R2CAT2A
C49: library part CMP-2006-04354-1, Manufacturer="AVX Interconnect / Elco", Part Number=06035A6R2CAT2A
C50: library part CMP-2006-04354-1, "0603 2.2 pF 50 V ±0.25 pF Tolerance C0G/NP0 SMT Multilayer Ceramic Capacitor", Manufacturer="AVX Interconnect / Elco", Part Number=06035A6R2CAT2A
C52: library part CMP-2006-02377-1, Manufacturer=Murata, Part Number=GCM188R71H152KA37D
D1 D3 D4 D5 D7: library part LED_0805_BLUE, "LED 0805 BLUE SMD"
D2: library part CMP-12828-000031-1, "TVS DIODE 33V 53.3V SMB", Breakdown Voltage=42.2V, Case/Package=SMB, Clamping Voltage=53.3V, Leakage Current=5uA, Max Operating Temperature=150°C, Max Power Dissipation=600W, Max Surge Current=11.3A, Min Breakdown Voltage=36.7V, Min Operating Temperature=-55°C, Package Quantity=3000, Power Line Protection=No, Resistor Type=Zener, Reverse Standoff Voltage=33V, Test Current=1mA, Clamping Voltage-Max=53.3V, Contact Plating=Tin, Diode Type=ZENER, Direction=Unidirectional, Element Configuration=Single, ESD Protection=No, Height=2.62mm, Lead Free="Lead Free", Length=4.57mm, Max Breakdown Voltage=42.2V, Max Reverse Leakage Current=5uA, Mount="Surface Mount", Number of Elements=1, Number of Pins=2, Number of Unidirectional Channels=1, Packaging="Tape and Reel", Peak Pulse Current=11.3A, Peak Pulse Power=600W, Polarity=Unidirectional, Power Dissipation=600W, Radiation Hardening=No, Reverse Breakdown Voltage=36.7V, RoHS Compliant=Yes, Series=SMBJ, Termination=SMD/SMT, Voltage Rating (DC)=33V, Width=3.9mm, Working Voltage=33V
D6: library part CMP-1431-00001-2, Case Code (Imperial)=1411, Case Code (Metric)=3528, Color="Green, Red", Forward Current=100mA, Forward Voltage=3.2V, Max Operating Temperature=85°C, Max Reverse Voltage (DC)=5V, Min Operating Temperature=-40°C, Power Dissipation=72mW, Test Current=20mA, Case/Package=1411, Dominant Wavelength=520nm, Height=1.9mm, Length=3.5mm, Lens Style="Clear, Round", Luminous Intensity=230mcd, Mount="Surface Mount", NexarPartId=29717795, Number of Pins=4, Packaging="Tape and Reel", Peak Wavelength=465nm, REACH SVHC=Unknown, RoHS=Compliant, Viewing Angle=120°, Wavelength=470nm, Width=2.8mm
FB1: library part CMP-0686-00374-3, "Chip Ferrite Bead, 0603, 600Ω @ 100MHz, 0.25Ω, 25%, 800mA", Case Code (Imperial)=0603, Case Code (Metric)=1608, Current Rating=800mA, DC Resistance (DCR)=250mR, Max Operating Temperature=125°C, Min Operating Temperature=-55°C, Package Quantity=1, Test Frequency=100MHz, Tolerance=25%, Case/Package=0603, Core Material=Ferrite, DC Current=800mA, Depth=0.8mm, Height=0.8mm, Impedance=600R, Lead Free="Lead Free", Length=1.6mm, Material=Steel, Max Current Rating=800mA, Max DC Current=800mA, Military Standard=Not, Number of Circuits=1, Number of Lines=1, Number of Pins=2, Packaging="Tape and Reel", Radiation Hardening=No, REACH SVHC="No SVHC", Termination=SMD/SMT, Weight=7.1E-05oz, Width=0.8mm
IC1: "Integrated Circuit", Manufacturer_Name=STMicroelectronics, Mouser Part Number=511-USBLC6-2SC6, Arrow Part Number=USBLC6-2SC6, Arrow Price/Stock=https://www.arrow.com/en/products/usblc6-2sc6/stmicroelectronics?utm_currency=USD&region=europe, Datasheet Link=http://www.st.com/st-web-ui/static/active/en/resource/technical/document/datasheet/CD00050750.pdf, Height=1.45mm, Manufacturer_Part_Number=USBLC6-2SC6, Mouser Price/Stock=https://www.mouser.co.uk/ProductDetail/STMicroelectronics/USBLC6-2SC6?qs=po45yt2pPpu%2FhNIlwQdTlg%3D%3D
IC2: "Integrated Circuit", Manufacturer_Name="Texas Instruments", Mouser Part Number=595-CC1200RHBR, Arrow Part Number=CC1200RHBR, Arrow Price/Stock=https://www.arrow.com/en/products/cc1200rhbr/texas-instruments, Datasheet Link=http://www.ti.com/lit/gpn/cc1200, Height=1mm, Manufacturer_Part_Number=CC1200RHBR, Mouser Price/Stock=https://www.mouser.co.uk/ProductDetail/Texas-Instruments/CC1200RHBR?qs=R6c3TimDHSkfQr3ZZbsbuA%3D%3D
J1: "Socket; DC supply; XT30; male; PIN: 2; on PCBs; THT; Colour: yellow", Package=None, Check_prices=https://www.snapeda.com/parts/XT30PW-M/AMASS/view-part/?ref=eda, MF=AMASS, MP=XT30PW-M, SnapEDA_Link=https://www.snapeda.com/parts/XT30PW-M/AMASS/view-part/?ref=snap
J2: library part CMP-204357-000001-1, "CONN SMA JACK STR EDGE MNT", Frequency=18GHz, Manufacturer="RF Solutions Ltd.", Package=CONN_JACK, Automotive=No, Category=Conn, ComponentLink2Description=Datasheet, ComponentLink2URL=https://www.rfsolutions.co.uk/downloads/1498648656DS-CON-EDGE-SMA-4.pdf, Conn Orientation="Right Angle", Contact Material=Gold, Device Class L1=Connectors, Device Class L2="RF / Coaxial Connectors", Device Class L3=unset, Digikey Description="CONN SMA JACK STR EDGE MNT", Footprint Url=https://forum.upverter.com/uploads/default/original/3X/b/e/be75b907af57498775929d6d9099689c472e0307.pdf, Height=6.35mm, Impedance=50Ω, Is Female=yes, Lead Free=Yes, Manufacturer Part Number=CON-SMA-EDGE-S, Number Of Contacts=1, Octopart=https://octopart.com/con-sma-edge-s-rf+solutions-70967450, RoHS=TRUE, Shielding=true
J2: "USB Connector Type C SMT 12 Pin", Manufacturer=GCT, Distributor Link=https://eu.mouser.com/ProductDetail/GCT/USB4105-GF-A-060?qs=QNEnbhJQKvY2mocwNJzgfA%3D%3D, Manufacturer Part Number=USB4105-GF-A-060
J4: library part CMP-77940-000002-1, "CONN HEADER VERT 3POS 2.54MM", Current Rating=3A, Manufacturer="Metz Connect", Temperature="-40°C to +105°C", Temperature Range High=+105°C, Temperature Range Low=-40°C, Automotive=No, Category=Conn, ComponentLink2Description=Datasheet, ComponentLink2URL=https://datasheet.octopart.com/PR20203VBNN-Metz-Connect-datasheet-101610322.pdf, Conn Gender=Male, Conn Orientation=Straight, Contact Material=Gold,Nickel, Device Class L1=Connectors, Device Class L2="Headers and Wire Housings", Device Class L3=unset, Digikey Description="CONN HEADER VERT 3POS 2.54MM", Height=8.6mm, Lead Free=Yes, Manufacturer Part Number=PR20203VBNN, Number Of Contacts=3, Number of Rows=1, Octopart=https://octopart.com/pr20203vbnn-metz+connect-87667116, Package=PR20203VBNN, Pitch=2.54mm, RoHS=TRUE
L1: library part CMP-2000-05090-4, "INDUCTOR, 2.2UH, 8A, 20%, 38MHZ, REEL", Case/Package=SMD/SMT, DC Resistance (DCR)=23.5mR, Inductance=2.2uH, Inductance Tolerance=20%, Max DC Current=8A, Max Operating Temperature=125°C, Min Operating Temperature=-40°C, Saturation Current=3.1A, Self Resonant Frequency=38MHz, Test Frequency=100kHz, Core Material=Composite, Height=2.1mm, Lead Free="Contains Lead", Length=4.3mm, Mount="Surface Mount", Packaging="Tape and Reel", REACH SVHC="No SVHC", RMS Current (Irms)=8A, RoHS Compliant=Yes, Series=XFL4020, Shielding=Shielded, Termination=SMD/SMT, Tolerance=20%, Width=4.3mm
L2 L3: library part CMP-06042-002204-1, "Multilayer type RF Inductor 56nH ±5% 0.75Ω 400mA 0603", Case Code (Imperial)=0603, Case Code (Metric)=1608, Current Rating=300mA, DC Resistance (DCR)=750mR, Inductance=56nH, Max Operating Temperature=85°C, Min Operating Temperature=-40°C, Package Quantity=1, Self Resonant Frequency=1.1GHz, Test Frequency=100MHz, Tolerance=5%, Case/Package=0603, Core Material=Air, DC Current=300mA, Depth=0.95mm, Height=0.031inch, Lead Free="Lead Free", Length=1.75mm, Max DC Current=300mA, Military Standard=Not, Mount="Surface Mount", Packaging="Tape and Reel", Q Factor=12, Radiation Hardening=No, Shielding=Unshielded, Termination=SMD/SMT, Width=0.031inch
L4 L5: library part CMP-06042-005497-1, "Multilayer type RF Inductor 27nH ±5% 0.54Ω 500mA 0603", Case Code (Imperial)=0603, Case Code (Metric)=1608, Current Rating=300mA, DC Resistance (DCR)=550mR, Inductance=27nH, Inductance Tolerance=5%, Max Operating Temperature=85°C, Min Operating Temperature=-55°C, Package Quantity=4000, Self Resonant Frequency=2GHz, Test Frequency=100MHz, Case/Package=0603, Core Material=Air, DC Current=300mA, Depth=0.95mm, Height=0.8mm, Height - Seated (Max)=0.037inch, Lead Free="Lead Free", Length=0.063inch, Max DC Current=300mA, Military Standard=Not, Mount="Surface Mount", Packaging="Tape and Reel", Q Factor=12, Radiation Hardening=No, REACH SVHC="No SVHC", Shielding=Unshielded, Termination=SMD/SMT, Tolerance=5%, Width=0.8mm
L6 L9: library part CMP-06042-008636-1, "Multilayer type RF Inductor 15nH ±5% 0.35Ω 600mA 0603", Case Code (Imperial)=0603, Case Code (Metric)=1608, Current Rating=350mA, DC Resistance (DCR)=400mR, Inductance=15nH, Inductance Tolerance=5%, Max Operating Temperature=85°C, Min Operating Temperature=-40°C, Package Quantity=4000, Self Resonant Frequency=2.8GHz, Test Frequency=100MHz, Case/Package=0603, Core Material=Air, DC Current=350mA, Depth=0.95mm, Height=0.031inch, Lead Free="Lead Free", Length=0.063inch, Max DC Current=350mA, Military Standard=Not, Mount="Surface Mount", Packaging="Tape and Reel", Q Factor=12, Radiation Hardening=No, REACH SVHC="No SVHC", Shielding=Unshielded, Termination=SMD/SMT, Tolerance=5%, Width=0.031inch
L7: library part CMP-06042-008636-1, "Multilayer type RF Inductor 43nH ±5%0603", Case Code (Imperial)=0603, Case Code (Metric)=1608, Current Rating=350mA, DC Resistance (DCR)=400mR, Inductance=15nH, Inductance Tolerance=5%, Max Operating Temperature=85°C, Min Operating Temperature=-40°C, Package Quantity=4000, Self Resonant Frequency=2.8GHz, Test Frequency=100MHz, Case/Package=0603, Core Material=Air, DC Current=350mA, Depth=0.95mm, Height=0.031inch, Lead Free="Lead Free", Length=0.063inch, Max DC Current=350mA, Military Standard=Not, Mount="Surface Mount", Packaging="Tape and Reel", Q Factor=12, Radiation Hardening=No, REACH SVHC="No SVHC", Shielding=Unshielded, Termination=SMD/SMT, Tolerance=5%, Width=0.031inch
L8: library part CMP-06042-016460-1, "Multilayer type RF Inductor 22nH ±5% 0.5Ω 500mA 0603", Case Code (Imperial)=0603, Case Code (Metric)=1608, Current Rating=300mA, DC Resistance (DCR)=500mR, Inductance=22nH, Inductance Tolerance=5%, Max Operating Temperature=85°C, Min Operating Temperature=-40°C, Package Quantity=4000, Self Resonant Frequency=2.3GHz, Test Frequency=100MHz, Case/Package=0603, Core Material=Air, DC Current=300mA, Depth=0.95mm, Height=0.8mm, Height - Seated (Max)=0.037inch, Lead Free="Lead Free", Length=1.6mm, Max DC Current=300mA, Military Standard=Not, Mount="Surface Mount", Packaging="Tape and Reel", Q Factor=12, Radiation Hardening=No, REACH SVHC="No SVHC", RoHS Compliant=Yes, Series=LQG18H, Shielding=Unshielded, Termination=SMD/SMT, Tolerance=5%, Width=0.031inch
MP1: library part CMP-03913-78870950-1, "36906326S WE-SHC Shielding Cabinet", Max Operating Temperature=125°C, Min Operating Temperature=-40°C, Core Material=Steel, Height=5.8mm, Length=31.6mm, NexarPartId=78870950, RoHS=Compliant, Width=31.6mm
Q1: "P-Channel 60-V (D-S) MOSFET", Package=None, Check_prices=https://www.snapeda.com/parts/SI7465DP/Vishay/view-part/?ref=eda, MF=Vishay, MP=SI7465DP, SnapEDA_Link=https://www.snapeda.com/parts/SI7465DP/Vishay/view-part/?ref=snap
Q2: library part CMP-2000-04931-2, "TRANS NPN 40V 0.2A SMD SOT23-3", Case/Package=SOT-23, Collector Base Voltage (VCBO)=60V, Collector Emitter Breakdown Voltage=40V, Collector Emitter Saturation Voltage=300mV, Continuous Collector Current=200mA, Emitter Base Voltage (VEBO)=6V, Frequency=300MHz, Max Operating Temperature=150°C, Max Power Dissipation=300mW, Min Operating Temperature=-55°C, Package Quantity=3000, Power Dissipation=350mW, Collector Emitter Voltage (VCEO)=40V, Contact Plating=Tin, Element Configuration=Single, Gain Bandwidth Product=300MHz, Height=1mm, hFE Min=100, Lead Free="Lead Free", Length=3.05mm, Max Breakdown Voltage=40V, Max Collector Current=200mA, Max Frequency=300MHz, Mount="Surface Mount", Number of Elements=1, Number of Pins=3, Packaging="Tape and Reel", Polarity=NPN, Radiation Hardening=No, REACH SVHC="No SVHC", Transition Frequency=300MHz, Voltage Rating (DC)=40V, Weight=0.000282oz, Width=1.4mm
SW1: library part CMP-2000-06501-2, "SWITCH SLIDE SPDT 300MA 6V", Case/Package=100, Contact Current Rating=300mA, Contact Resistance=70mR, Max Operating Temperature=85°C, Max Voltage Rating (DC)=6V, Min Operating Temperature=-40°C, Package Quantity=1, Actuator Length=2mm, Actuator Material=Nylon, Actuator Type=Standard, Contact Material="Copper Alloy", Contact Plating=Silver, Current Rating=300mA, Electrical Life=5000Cycles, Housing Material=Nylon, Illumination Type=Non-Illuminated, Lead Free="Lead Free", Length=9mm, Max Current Rating=300mA, Mount="Surface Mount", Orientation="Right Angle", Packaging="Tape and Reel", Radiation Hardening=No, REACH SVHC="No SVHC", Switch Function=On-On, Switch Travel=2mm, Termination="Gull Wing", Throw Configuration=SPDT, Voltage Rating (DC)=6V
U1: library part CMP-04910-000015-1, "IC MONITOR PWR/CURR 16TSSOP", Ambient Temperature Range High=+125°C, Ambient Temperature Range Low=-40°C, Manufacturer="Texas Instruments", Max Junction Temp=+150°C, Max Supply Voltage=5.5V, Min Supply Voltage=2.7V, Nominal Supply Current=310uA, Output Current=10mA, Package=PW0016A, Temperature="-40°C to +125°C", Automotive=No, Category=IC, ComponentLink2Description=Datasheet, ComponentLink2URL=http://www.ti.com/lit/ds/symlink/ina260.pdf, Device Class L1="Integrated Circuits (ICs)", Device Class L2="Power Management ICs", Device Class L3=unset, Digikey Description="IC MONITOR PWR/CURR 16TSSOP", Height=1.2mm, Lead Free=Yes, Manufacturer Part Number=INA260AIPWR, Octopart=https://octopart.com/ina260aipwr-texas+instruments-75199489, RoHS=TRUE, Standoff Height=0.05mm, Temperature Range High=+125°C, Temperature Range Low=-40°C
U2: library part CMP-09139-000009-1, "IC REG BUCK ADJUSTABLE 2A 16LQFN", Manufacturer="Analog Devices", Max Junction Temp=+125°C, Max Supply Voltage=42V, Min Supply Voltage=3V, Nominal Supply Current=1-1.7uA, Output Current=2A, Package=LQFN-16-05-08-1516, Switching Frequency=200-2200kHz, Temperature="-40°C to +125°C", Temperature Range Low=-40°C, Automotive=No, Category=IC, ComponentLink2Description=Datasheet, ComponentLink2URL=https://www.analog.com/media/en/technical-documentation/data-sheets/LT8609S.pdf, Device Class L1="Integrated Circuits (ICs)", Device Class L2="Power Management ICs", Device Class L3="Voltage Regulators - Switching", Digikey Description="IC REG BUCK ADJUSTABLE 2A 16LQFN", Height=1.03mm, Lead Free=Yes, Manufacturer Part Number=LT8609SIV#PBF, Max Duty Cycle=100%, Mouser Description="LT8609S - 42V, 2A/3A Peak Synchronous Step-Down Regulator with 2.5µA Quiescent Current", Number Of Outputs=1, Octopart=https://octopart.com/lt8609siv%23pbf-analog+devices-88316701, Output Type=AdjustableProgrammable, RoHS=TRUE, Standoff Height=0.01mm, Switching Topology=Buck, Temperature Range High=+125°C
U3 U5: "Automotive, 500mA, low-noise ultra-low-IQ high-PSRR low-dropout (LDO) voltage regulator", Package=None, Check_prices=https://www.snapeda.com/parts/TPS7A2133PQWDRBRQ1/Texas+Instruments/view-part/?ref=eda, MF="Texas Instruments", MP=TPS7A2133PQWDRBRQ1, SnapEDA_Link=https://www.snapeda.com/parts/TPS7A2133PQWDRBRQ1/Texas+Instruments/view-part/?ref=snap
U4: library part CMP-0339-00012-2, "Dual In / Single Out Autoswitching Power Mux, 2.8 to 5.5 V, -40 to 85 degC, 9-pin SON (DRB), Green (RoHS & no Sb/Br)", IN1 Output Current(Max)(A)=1.25, IN1, IN2 Input Voltage(Max)(V)=5.5, IN1, IN2 Input Voltage(Min)(V)=2.8, Manufacturer="Texas Instruments", ComponentLink1Description=Datasheet, ComponentLink1URL=http://www.ti.com/general/docs/lit/getliterature.tsp?genericPartNumber=TPS2113A&fileType=pdf, DatasheetVersion=SBVS045C, Eco-Plan="Green (RoHS & no Sb/Br)", IN1 rDS(on)(Typ)(mOhm)=84, IN2 Output Current(Max)(A)=1.25, IN2 rDS(on)(Typ)(Ohms)=0.084, Mounting Technology="Surface Mount", Number of Inputs=2, PackageDescription="8-Pin Plastic Small Outline No-Lead, 3 x 3 x 1 mm Body, 0.65 mm Pitch, Exposed Pad", PackageReference=DRB0008B, PackageVersion="revK, Jun-2012", PartNumber=TPS2113ADRBT, SubFamily="Power Multiplexer (MUX)"
U6: "32-Bit Dual-Core ARM Cortex-M0+ Microcontroller", Manufacturer="Raspberry Pi", Manufacturer Part Number=RP2040
U7: "FLASH - NOR Memory IC 128Mb (16M x 8) SPI - Quad I/O, QPI, DTR 133 MHz 8-SOIC", Package="SOIC-8 Winbond Electronics", Check_prices=https://www.snapeda.com/parts/W25Q128JVSIQ/Winbond/view-part/?ref=eda, MF="Winbond Electronics", MP=W25Q128JVSIQ, SnapEDA_Link=https://www.snapeda.com/parts/W25Q128JVSIQ/Winbond/view-part/?ref=snap
Y1: "12 MHz Â±30ppm Crystal 10pF 50 Ohms 4-SMD, No Lead", Package="NON-STANDARD-4 Abracon", Check_prices=https://www.snapeda.com/parts/ABM8-272-T3/Abracon/view-part/?ref=eda, MF=ABRACON, MP=ABM8-272-T3, SnapEDA_Link=https://www.snapeda.com/parts/ABM8-272-T3/Abracon/view-part/?ref=snap
Y2: library part CMP-27762-015223-1, "Parallel - Fundamental Quartz Crystal, 40MHz Nom", Case/Package=CSMD, ESR (Equivalent Series Resistance)=50R, Frequency=40MHz, Frequency Stability=30ppm, Frequency Tolerance=20ppm, Load Capacitance=18pF, Max Operating Temperature=85°C, Min Operating Temperature=-40°C, Package Quantity=1000, Depth=2.5mm, Height=0.039inch, Length=3.2mm, Mount="Surface Mount", Number of Pins=4, Packaging="Tape and Reel", Radiation Hardening=No, Series=ABM8G, Series Resistance=50R, Termination=SMD/SMT, Tolerance=20ppm, Width=0.098inch
C1 C2 C3 C4 C5 C6 C7 C8 C9 C10 C11 C12 C13 C14 C17 C18 C19 C20 C21 C22 C23 C24 C25 C26 C27 C28 C29 C30 C31 C32 C33 C34 C35 C36 C37 C42 C43 C44 C45 C53 C54 C55 C56 C57 C58 C59 C60 C61 C62 C63: SimulationGenericComponent=True
R1 R2 R3 R4 R5 R6 R7 R8 R9 R10 R11 R12 R13 R14 R15 R16 R17 R18 R19 R20 R21 R22 R23 R24 R25 R26 R27 R28 R29 R30: SimulationGenericComponent=True, TC1=0, TC2=0

## Free pads (board coordinates)
  round 5 hole 3: 15(2.5,2.5) 15(2.5,47.5) 15(96,2.5) 15(96,47.5)

## Via types
v1: diameter 0.45, hole 0.3, Top Layer to Bottom Layer, 267 vias
v2: diameter 0.6, hole 0.3, Top Layer to Bottom Layer, 9 vias
v3: diameter 0.5, hole 0.3, Top Layer to Bottom Layer, 4 vias
v4: diameter 1, hole 0.7, Top Layer to Bottom Layer, 3 vias

## Nets (pads, with @x,y where several pads share a name; then routed paths per layer and width w, separated by ;. In a path a pad name is that pad's centre, name@x,y a point inside that pad or via, vN(x,y) a via of type N, cw(c..) or ccw(c..) an arc to the next point about the centre after c; other vN are vias at no path point)
+1.1V: C31.1 C32.1 C33.1 U6.23 U6.45 U6.50 | length 17.5
  Top Layer w0.254: v1(53.275,31.4) 53.3,31.375 U6.50@53.3,30.375 53.3,29.4 53.75,28.95 54.975,28.95 ; v1(53.875,22.825) 53.875,22.878 54.1,23.103 54.1,24.425 54.45,24.775 55.075,24.775 55.35,25.05 55.35,28.575 54.975,28.95 ; U6.45@55.3,30.375 55.3,29.275 54.975,28.95
  Bottom Layer w0.254: C31.1@50.25,32.25 52.425,32.25 C33.1@52.75,31.925 ; C33.1@52.75,32.25 C33.1@52.75,31.925 ; v1(53.275,31.4) C33.1@52.75,31.925 ; v1(53.875,22.825) 53.913,22.787 53.913,21.837 C32.1@54,21.75